# Altium PCB MAGI'sCore-NoButton.PcbDoc (part 1 of 2)
Units mil, origin at the board's own origin, x right, y up, seen from the top; angles counter-clockwise.
Board outline 6000 x 4000 mil, 2 copper layers (Top Layer, Bottom Layer); 22 components, 33 nets, 128 pads, 28 vias.
Unrouted connection lines stored in the file: 1.
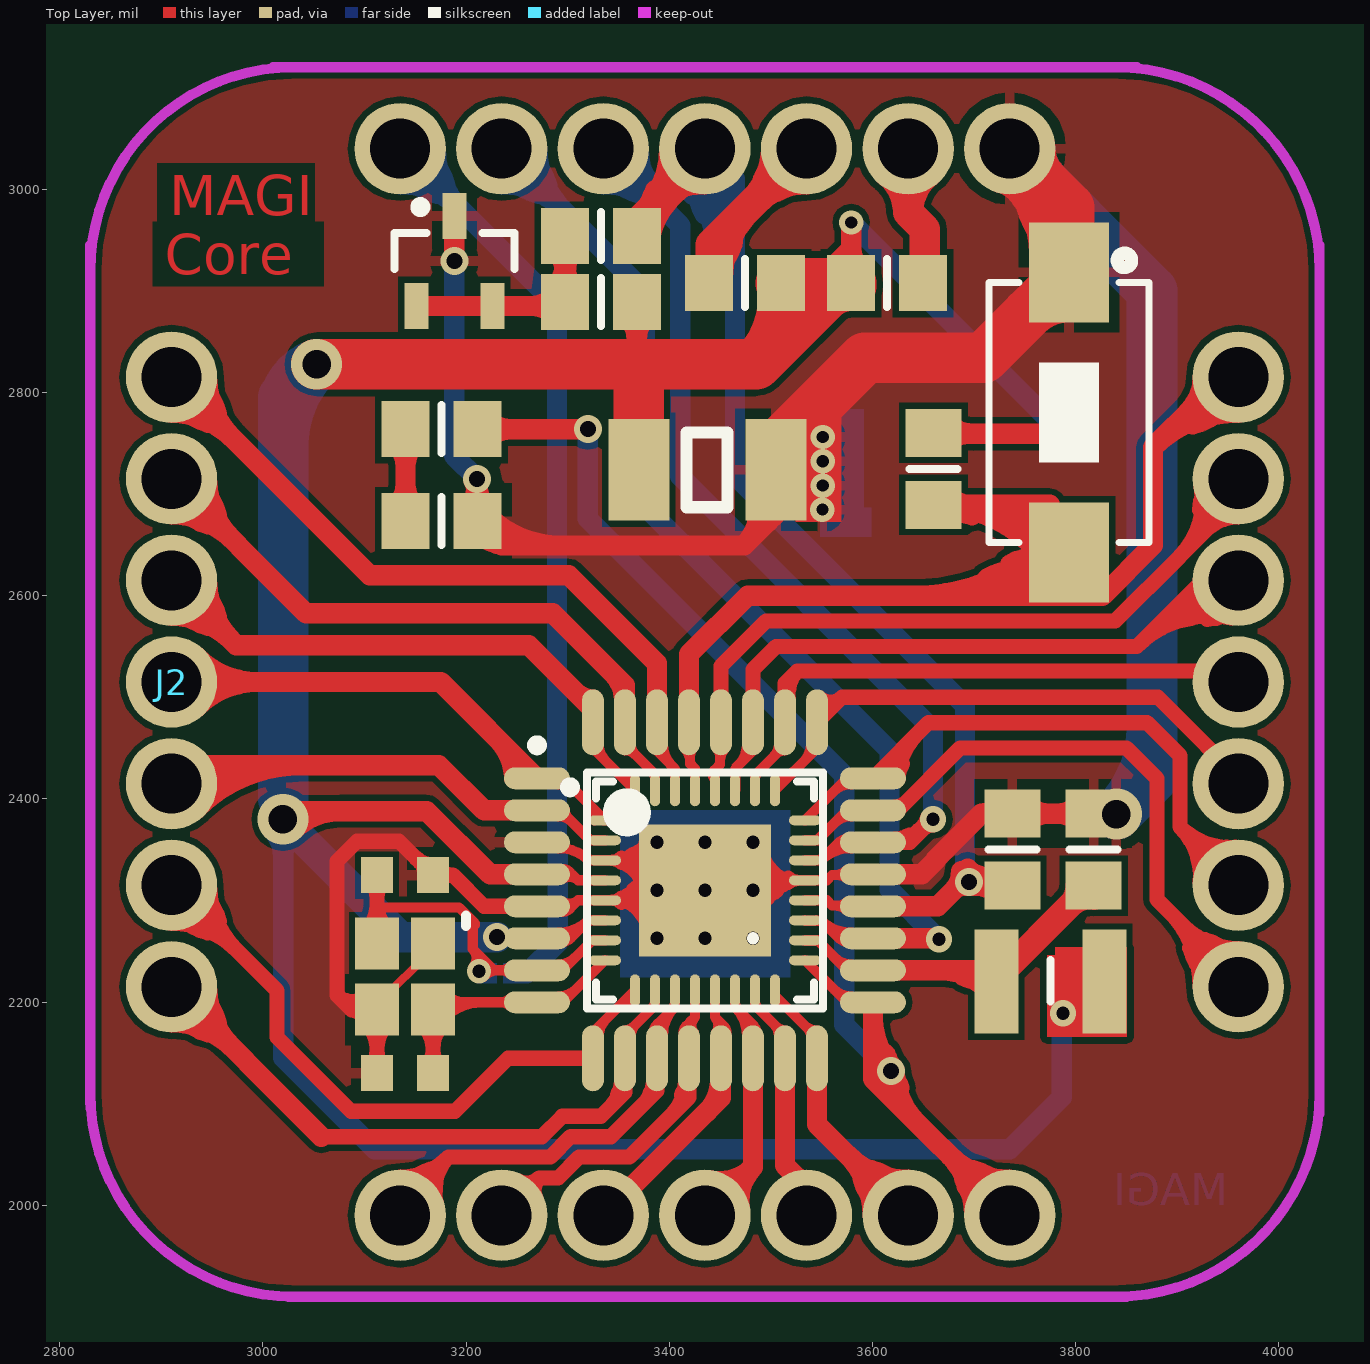
[diagram p0: Top Layer view]
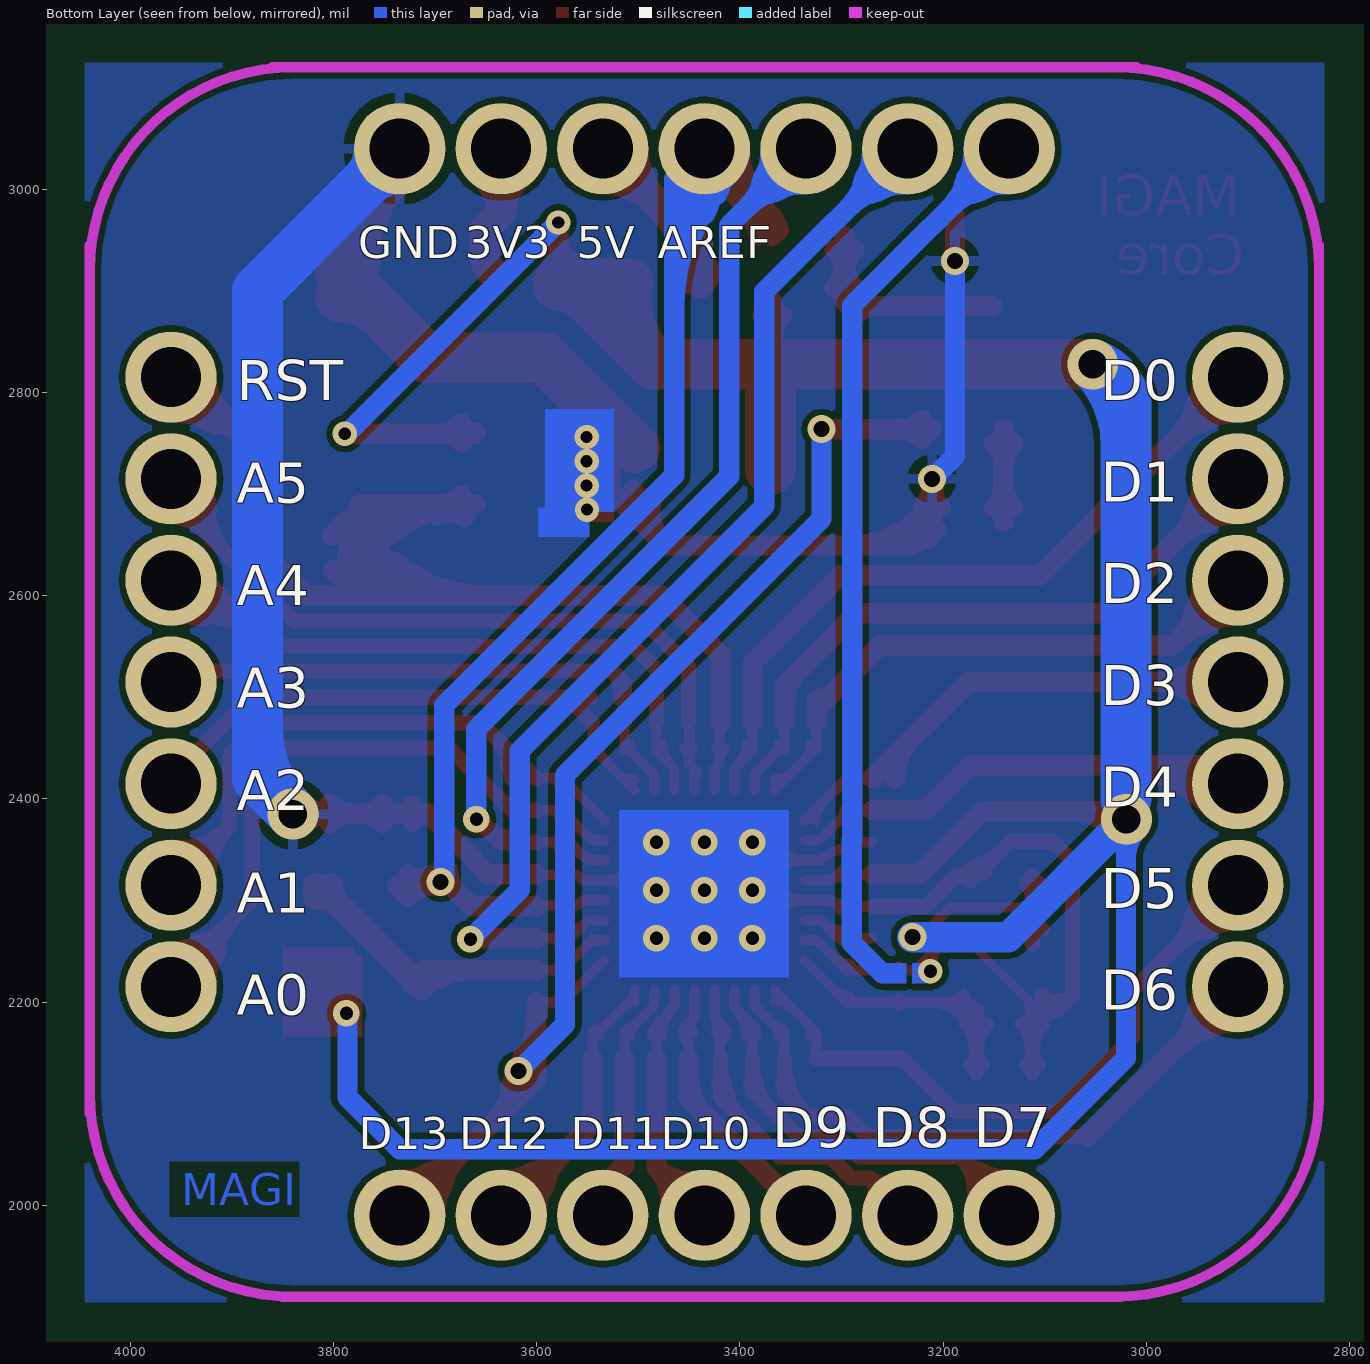
[diagram p1: Bottom Layer view, seen from below]

## Layer stack, top to bottom
Top Solder: solder mask 0.4, Solder Resist, Dk 3.5
Top Layer: signal copper 1.4
Dielectric1: dielectric 12.6, FR-4, Dk 4.8
Bottom Layer: signal copper 1.4
Bottom Solder: solder mask 0.4, Solder Resist, Dk 3.5

## Board outline
1000,1000 7000,1000 7000,5000 1000,5000

## Design rules (kind name [scope] priority, off if disabled: settings)
Clearance [All] p1: gap=6
ComponentClearance [All] p1: gap=0 collisioncheckmode=3 verticalgap=0 showdistances=FALSE
PolygonConnect [All] p1: connectstyle=Relief reliefconductorwidth=10 reliefentries=4 polygonreliefangle="90 Angle" airgapwidth=10
RoutingVias [All] p1: holewidth=28 width=50 viastyle="Through Hole" minholewidth=28 minwidth=50 maxholewidth=28 maxwidth=50
SilkToSilkClearance [All] p1: silktosilkclearance=0
SolderMaskExpansion [All] p1: expansion=4
Width [All] p1: maxlimit=100 minlimit=6 preferedwidth=10
27 further rules are at their usual default settings.

## Components (designator, comment, footprint, x,y, rotation, side; value= is the part's Value field where it differs from the comment)
C1 "CAP_1" 1210 3504.92,2724.02 r180 top
C2 "CAP_1" 6-0805_N 3817.6,2350 r270 top
C3 "CAP_1" 6-0805_N 3737.6,2350 r270 top
C7 "CAP_1" 1608[0603] 3139.76,2129.92 r0 top
C8 "CAP_1" 1608[0603] 3139.76,2324.92 r0 top
Cry1 "SMD-Crystal" 3225 3139.76,2224.92 r270 top
J1 "CON7" CON7 3960,2215 r90 top
J2 "CON7" CON7 2910,2815 r270 top
J3 "CON7" CON7 3735,3040 r180 top
J4 "CON7" CON7 3135,1990 r0 top
L2 "INDUCTOR" 14-1210 3775,2220 r0 top
LED3 "LED_3" 6-0805_N 3175.79,2673.23 r0 top
R1 "RES1_1" 6-0805_N 3332.68,2953.94 r0 top
R1 "RES1_1" 6-0805_N 3332.48,2889.17 r0 top
R2 "000" 6-0805_n 3614.17,2907.48 r180 top
R3 "000" 6-0805_n 3474.41,2907.48 r180 top
R8 "RES1_1" 6-0805_N 3175.79,2763.78 r0 top
R9 "RES1_1" 6-0805_N 3660.04,2724.8 r90 top
RESETButton "" SW 3793.31,2785.43 r180 top
U1 "ATmega8A-AU" 32A_N 3435,2310 r0 top
U2 "ATmega8A-MU" 32M1-A_N 3435,2310 r0 top
U3 "TL431" SOT23_N 3188.39,2929.33 r90 top

## Footprints (in the part's own frame and the unit in brackets; to place one, negate y for a bottom-side part, rotate by r counter-clockwise, add the part's x,y. Pads: shape width x height; smd on the part's side, far side on the other; paste and mask are expansions set on the pad)
6-0805_N [mm] "Chip Resistor, Body 2.0x1.2mm, IPC Medium Density"
  rect 1.2x1.4 smd: 1(-0.9,0) 2(0.9,0)
  silkscreen extent 0,-0.6 0,0.6, body extent -1.07,-0.7 1.07,0.7, height 0.7
6-0805_n [mm] "Chip Resistor, Body 2.0x1.2mm, IPC Medium Density"
  rect 1.2x1.4 smd: 1(-0.9,0) 2(0.9,0)
  silkscreen extent 0,-0.6 0,0.6, body extent -1.07,-0.7 1.07,0.7, height 0.7
14-1210 [mm] "Chip Resistor, Body 3.2x2.5mm, IPC High Density"
  rect 1.1x2.6 smd: 1(-1.35,0) 2(1.35,0)
  silkscreen extent 0,-0.5 0,0.55, body extent -1.68,-1.32 1.68,1.32, height 0.9
32A_N [mm] "32-Pin Thin Quad Flat Pack 0.8 mm Pitch, IPC Medium Density"
  oval 1.65x0.55 smd: 1(-4.2,2.8) 2(-4.2,2) 3(-4.2,1.2) 4(-4.2,0.4) 5(-4.2,-0.4) 6(-4.2,-1.2) 7(-4.2,-2) 8(-4.2,-2.8) 17(4.2,-2.8) 18(4.2,-2) 19(4.2,-1.2) 20(4.2,-0.4) 21(4.2,0.4) 22(4.2,1.2) 23(4.2,2) 24(4.2,2.8)
  oval 0.55x1.65 smd: 9(-2.8,-4.2) 10(-2,-4.2) 11(-1.2,-4.2) 12(-0.4,-4.2) 13(0.4,-4.2) 14(1.2,-4.2) 15(2,-4.2) 16(2.8,-4.2) 25(2.8,4.2) 26(2,4.2) 27(1.2,4.2) 28(0.4,4.2) 29(-0.4,4.2) 30(-1.2,4.2) 31(-2,4.2) 32(-2.8,4.2)
  silkscreen extent -4.32,-2.95 2.95,3.75, body extent -3.5,-3.5 3.5,3.5, height 1.2
32M1-A_N [mm] "QFN, 32-Leads, Body 5x5mm, Pitch 0.5mm, IPC Medium Density"
  oval 0.8x0.25 smd: 1(-2.5,1.75) 2(-2.5,1.25) 3(-2.5,0.75) 4(-2.5,0.25) 5(-2.5,-0.25) 6(-2.5,-0.75) 7(-2.5,-1.25) 8(-2.5,-1.75) 17(2.5,-1.75) 18(2.5,-1.25) 19(2.5,-0.75) 20(2.5,-0.25) 21(2.5,0.25) 22(2.5,0.75) 23(2.5,1.25) 24(2.5,1.75)
  oval 0.25x0.8 smd: 9(-1.75,-2.5) 10(-1.25,-2.5) 11(-0.75,-2.5) 12(-0.25,-2.5) 13(0.25,-2.5) 14(0.75,-2.5) 15(1.25,-2.5) 16(1.75,-2.5) 25(1.75,2.5) 26(1.25,2.5) 27(0.75,2.5) 28(0.25,2.5) 29(-0.25,2.5) 30(-0.75,2.5) 31(-1.25,2.5) 32(-1.75,2.5)
  rect 3.3x3.3 smd: 33(0,0)
  silkscreen extent -3.5,-2.73 2.73,2.73, body extent -2.58,-2.58 2.58,2.58, height 1
1210 [mil]
  rect 60x100 smd: 1(0,0) 2(135,0)
  silkscreen extent 48,-36 88,37
1608[0603] [mm] "Chip Capacitor, Body 1.6x0.8mm, IPC High Density"
  rect 0.8x0.9 smd: 1(-0.7,0) 2(0.7,0)
  body extent -0.87,-0.48 0.87,0.48, height 1.3
3225 [mil] "SMD3225"
  rect 51.18x43.31 smd: 1(-32.5,-27.5) 2(32.5,-27.5) 3(32.5,27.5) 4(-32.5,27.5)
  silkscreen extent -60,60 -50,60
CON7 [mil]
  round 90 hole 59.06: 1(0,0) 2(100,0) 3(200,0) 4(300,0) 5(400,0) 6(500,0) 7(600,0)
SOT23_N [mm] "SOT23, 3-Leads, Body 2.9x1.3mm, Pitch 0.95mm, Lead Span 2.3mm - Reverse Pinning, IPC Medium Density"
  rect 1.15x0.6 smd: 1(1.125,0) 2(-1.125,-0.95) 3(-1.125,0.95)
  silkscreen extent -0.2,-1.5 1.47,1.5, body extent -0.7,-1.5 0.7,1.5, height 1.1
SW [mm]
  rect 2x2.5 smd: 1(0,3.627) 2(0,-3.373)
  silkscreen extent -2,-3.12 2,3.38

## Part data
C1 C2 C3 C7 C8: "Capacitor"
Cry1: library part Crystal
J1 J2 J3 J4: "Connector"
R2 R3: library part RES1
RESETButton: library part CON2, "Connector"
U1: "8-bit AVR Microcontroller, 8KB Flash, 512 Bytes EEPROM, 1KB SRAM, 32-pin TQFP, Industrial Grade (-40癈 to 85癈)"
U2: "8-bit AVR Microcontroller, 8KB Flash, 512 Bytes EEPROM, 1KB SRAM, 33-pin MLF, Industrial Grade (-40癈 to 85癈)"

## Via types
v1: diameter 25.98, hole 12.99, Top Layer to Bottom Layer, tented top, 7 vias
v2: diameter 27.56, hole 15.75, Top Layer to Bottom Layer, 6 vias
v3: diameter 24, hole 12, Top Layer to Bottom Layer, 6 vias
v4: diameter 25.98, hole 12.99, Top Layer to Bottom Layer, 5 vias
v5: diameter 50, hole 28, Top Layer to Bottom Layer, 3 vias
v6: diameter 24, hole 12.99, Top Layer to Bottom Layer, 1 vias

## Nets (pads, with @x,y where several pads share a name; then routed paths per layer and width w, separated by ;. In a path a pad name is that pad's centre, name@x,y a point inside that pad or via, vN(x,y) a via of type N, cw(c..) or ccw(c..) an arc to the next point about the centre after c; other vN are vias at no path point)
3.3V: J3.2 R2.1 | length 377.2
  Top Layer w30: J3.2@3635,3040 3635,2977.2 ; 3635,2977.21 cw(c3685.71,2977.21) 3653.85,3016.66 ccw(c3685.71,2977.21) 3635,2977.21 ; 3635,2977.21 ccw(c3584.29,2977.21) 3616.15,3016.66 cw(c3584.29,2977.21) 3635,2977.21 ; 3635,2977.2 3651.57,2960.63 3651.57,2937.01 ; R2.1@3643.51,2917.51 ccw(c3624.04,2936.99) 3651.57,2936.99 ; R2.1@3643.51,2917.51 ccw(c3624.04,2936.99) 3651.57,2936.99 ; R2.1@3643.51,2917.51 ccw(c3624.04,2936.99) 3651.57,2936.99 ; R2.1@3643.51,2917.51 ccw(c3624.04,2936.99) 3651.57,2936.99
ADC6: J3.6 U1.19 U2.19 | length 1629.6
  Top Layer w10: U2.19@3533.43,2280.47 3533.9,2280 3550,2280 ; U1.19@3600.35,2262.76 3567.24,2262.76 ; 3550,2280 ccw(c3577.6,2307.59) 3578.56,2268.58 cw(c3577.6,2307.59) 3550,2280 ; 3550,2280 3567.24,2262.76 ; 3567.24,2262.76 cw(c3567.24,2254.41) 3573.99,2259.32 ccw(c3567.24,2254.41) 3567.24,2262.76 ; 3567.24,2262.76 ccw(c3567.24,2271.1) 3573.99,2266.19 cw(c3567.24,2271.1) 3567.24,2262.76 ; U2.19@3544.25,2280.55 cw(c3544.25,2268.01) 3553.12,2276.88 ccw(c3544.25,2268.01) U2.19@3544.25,2280.55 ; 3566.49,2263.5 ccw(c3578.39,2275.4) 3578.8,2258.58 cw(c3578.39,2275.4) 3566.49,2263.5
  Top Layer w20: U1.19@3600.35,2262.76 3664.41,2262.76 v4(3665.35,2261.81)
  Bottom Layer w20: J3.6@3230.1,3039 ccw(c3286.07,3050.46) 3271.28,2995.28 ; J3.6@3235,3040 3375.98,2899.02 3375.98,2688.19 3616.73,2447.44 3616.73,2310.43 v4(3665.35,2261.81) ; J3.6@3236,3044.9 cw(c3224.54,2988.93) 3279.72,3003.72 ; 3294.75,2980.25 cw(c3354.5,3040) 3270,3040 ccw(c3354.5,3040) 3294.75,2980.25 ; 3294.75,2980.25 ccw(c3235,2920.5) 3235,3005 cw(c3235,2920.5) 3294.75,2980.25
ADC7: J3.5 U1.22 U2.22 | length 1661.6
  Top Layer w10: U2.22@3533.43,2339.53 3549.53,2339.53 ; U1.22@3600.35,2357.24 3567.24,2357.24 ; 3549.53,2339.53 cw(c3578.23,2310.82) 3578.64,2351.42 ccw(c3578.23,2310.82) 3549.53,2339.53 ; 3549.53,2339.53 3567.24,2357.24 ; 3567.24,2357.24 cw(c3567.24,2348.89) 3573.99,2353.81 ccw(c3567.24,2348.89) 3567.24,2357.24 ; 3567.24,2357.24 ccw(c3567.24,2365.59) 3573.99,2360.67 cw(c3567.24,2365.59) 3567.24,2357.24 ; U2.22@3544.25,2339.45 ccw(c3544.25,2352) 3553.13,2343.12 cw(c3544.25,2352) U2.22@3544.25,2339.45 ; 3566.36,2356.36 cw(c3578.57,2344.15) 3578.74,2361.42 ccw(c3578.57,2344.15) 3566.36,2356.36
  Top Layer w15: U1.22@3600.35,2357.24 3636.77,2357.24 v4(3659.45,2379.92) ; U1.22@3624.89,2355.58 cw(c3641.35,2346.08) 3636.43,2364.43 ; 3647.06,2369.07 cw(c3656.73,2363.49) v4@3658.55,2374.5 ; 3644.15,2368.31 ccw(c3633.42,2386.9) v4@3654.14,2381.34 ; 3644.15,2368.31 ccw(c3633.42,2386.9) v4@3654.14,2381.34 ; 3644.15,2368.31 ccw(c3633.42,2386.9) v4@3654.14,2381.34 ; 3650.07,2370.55 cw(c3659.45,2361.17) 3659.45,2374.43 ccw(c3659.45,2361.17) 3650.07,2370.55 ; 3650.07,2370.55 ccw(c3640.7,2379.92) 3653.96,2379.92 cw(c3640.7,2379.92) 3650.07,2370.55 ; U1.22@3622.01,2360.57 ccw(c3622.01,2404.24) 3652.89,2373.36 cw(c3622.01,2404.24) U1.22@3622.01,2360.57
  Bottom Layer w20: J3.5@3330.1,3039 ccw(c3386.07,3050.46) 3371.28,2995.28 ; J3.5@3335,3040 3410.67,2964.33 3410.67,2717.28 3659.45,2468.5 v4(3659.45,2379.92) ; J3.5@3336,3044.9 cw(c3324.54,2988.93) 3379.72,3003.72 ; 3394.75,2980.25 cw(c3454.5,3040) 3370,3040 ccw(c3454.5,3040) 3394.75,2980.25 ; 3394.75,2980.25 ccw(c3335,2920.5) 3335,3005 cw(c3335,2920.5) 3394.75,2980.25
AREF2V5: R1.1 U3.2 U3.3 | length 389.2
  Top Layer w20: U3.3@3150.98,2885.04 U3.2@3225.79,2885.04 3292.91,2885.04 R1.1@3297.05,2889.17 3297.05,2953.74 R1.1@3297.24,2953.94 ; 3263.69,2885.04 ccw(c3263.69,2918.6) R1.1@3287.42,2894.87 ; 3264.64,2885.04 cw(c3264.64,2852.83) R1.1@3287.42,2875.6 ; R1.1@3287.42,2902.74 ccw(c3264.16,2926) 3297.05,2926 ccw(c3329.93,2926) R1.1@3306.68,2902.74 ; R1.1@3287.61,2940.37 cw(c3264.83,2917.59) 3297.05,2917.59 ; R1.1@3297.05,2916.64 cw(c3330.61,2916.64) R1.1@3306.88,2940.37 ; 3298.81,2923.23 ccw(c3316.57,2918.47) R1.1@3305.36,2903.9
GND: C1.1 C2.1 C3.1 C7.1 C8.2 Cry1.2 Cry1.4 J3.1 LED3.2 RESETButton.2 U1.3 U1.5 U1.21 U2.3 U2.5 U2.21 U2.33 U3.1 | length 10625.6
  Top Layer w8: Cry1.2@3112.26,2192.42 3112.26,2197.39 3167.26,2252.39 Cry1.4@3167.26,2257.42
  Top Layer w10: U1.5@3269.65,2294.25 3304.25,2294.25 ; U1.3@3269.65,2357.24 U1.3@3290,2357.24 ; U1.3@3291.36,2351.42 cw(c3291.77,2310.82) 3320.47,2339.53 U2.3@3336.57,2339.53 3405.47,2339.53 v1(3435,2310) ; U2.3@3347.33,2339.57 cw(c3355.45,2334.88) 3353.03,2343.94 ; 3360.12,2345.23 cw(c3376.79,2324.16) U2.33@3385.24,2349.66 ; 3362.25,2304.19 cw(c3372.12,2287.09) U2.33@3383.25,2303.4 ; U2.33@3372.37,2342.6 ccw(c3360.26,2357.9) U2.33@3379.77,2357.43 ; U2.33@3374.66,2356.73 cw(c3383.77,2345.22) U2.33@3388.39,2359.15 ; U2.33@3375.32,2300.58 ccw(c3370.79,2308.41) U2.33@3379.8,2309.25 ; U2.33@3375.94,2272.2 ccw(c3394.35,2279.16) U2.33@3387.01,2260.89 ; U2.33@3376.07,2301.01 cw(c3382.41,2290.04) U2.33@3385.69,2302.28 ; U2.33@3377.5,2346.66 cw(c3385.36,2336.72) U2.33@3386.83,2349.31 ; U2.33@3392.83,2303.82 cw(c3401.09,2293.76) U2.33@3408.75,2304.3 ; U2.33@3409.5,2304.19 cw(c3419.37,2287.09) U2.33@3430.49,2303.4 ; U2.33@3422.56,2300.58 ccw(c3418.04,2308.41) U2.33@3427.04,2309.25 ; U2.33@3423.32,2301.01 cw(c3429.65,2290.04) U2.33@3432.93,2302.28 ; U2.33@3437.07,2317.72 ccw(c3440.35,2329.96) U2.33@3446.68,2318.99 ; U2.33@3439.51,2316.6 ccw(c3450.63,2332.91) U2.33@3460.5,2315.81 ; U2.33@3442.96,2310.75 cw(c3451.96,2311.59) U2.33@3447.44,2319.42 ; U2.33@3461.27,2315.7 ccw(c3468.93,2326.28) U2.33@3477.21,2316.18 ; U2.33@3483.03,2359.11 cw(c3475.66,2340.81) U2.33@3494.11,2347.78 ; U2.33@3484.35,2317.72 ccw(c3487.63,2329.96) U2.33@3493.97,2318.99 ; U2.33@3486.79,2316.6 ccw(c3497.92,2332.91) 3507.79,2315.81 ; U2.33@3490.24,2310.75 cw(c3499.25,2311.59) U2.33@3494.72,2319.42 ; U1.21@3599.61,2325 3560,2325 3554.84,2319.84 U2.21@3533.43,2319.84 U2.33@3444.84,2319.84 ; 3304.25,2294.25 cw(c3304.25,2305.73) 3295.66,2298.12 ccw(c3304.25,2305.73) 3304.25,2294.25 ; 3304.25,2294.25 ccw(c3304.25,2282.77) 3295.66,2290.39 cw(c3304.25,2282.77) 3304.25,2294.25 ; 3304.25,2294.25 3310.16,2300.16 ; 3310.16,2300.16 cw(c3301.75,2308.57) 3294.73,2298.96 ccw(c3301.75,2308.57) 3310.16,2300.16 ; 3310.16,2300.16 U2.5@3336.57,2300.16 U2.33@3425.16,2300.16 ; U2.5@3336.57,2300.16 cw(c3336.58,2238.42) 3386.51,2274.73 ccw(c3336.58,2238.42) U2.5@3336.57,2300.16 ; U2.5@3336.57,2300.16 ccw(c3336.58,2344.49) 3378.41,2329.83 cw(c3336.58,2344.49) U2.5@3336.57,2300.16 ; U2.3@3336.57,2339.53 ccw(c3336.58,2395.33) 3381.34,2362.02 cw(c3336.58,2395.33) U2.3@3336.57,2339.53 ; U2.3@3336.57,2339.53 cw(c3336.58,2300.62) 3375.31,2304.31 ccw(c3336.58,2300.62) U2.3@3336.57,2339.53 ; 3354.01,2304.79 cw(c3367.8,2288.39) U2.33@3382.33,2304.13 ; 3354.01,2304.79 cw(c3367.8,2288.39) U2.33@3382.33,2304.13 ; 3354.01,2304.79 cw(c3367.8,2288.39) U2.33@3382.33,2304.13 ; 3355.87,2302.66 cw(c3370.23,2272.83) U2.33@3384.35,2302.77 ; 3355.87,2302.66 cw(c3370.23,2272.83) U2.33@3384.35,2302.77 ; 3355.87,2302.66 cw(c3370.23,2272.83) U2.33@3384.35,2302.77 ; 3362.36,2294.5 cw(c3331.81,2257.18) U2.33@3379.8,2261.96 ; 3362.36,2294.5 cw(c3331.81,2257.18) U2.33@3379.8,2261.96 ; 3362.36,2294.5 cw(c3331.81,2257.18) U2.33@3379.8,2261.96 ; 3362.7,2312.09 cw(c3375.56,2296.79) U2.33@3389.12,2311.48 ; 3362.7,2312.09 cw(c3375.56,2296.79) U2.33@3389.12,2311.48 ; 3362.7,2312.09 cw(c3375.56,2296.79) U2.33@3389.12,2311.48 ; 3368.41,2322.83 ccw(c3389.94,2330.86) U2.33@3387.55,2308 ; 3368.41,2322.83 ccw(c3389.94,2330.86) U2.33@3387.55,2308 ; 3368.41,2322.83 ccw(c3389.94,2330.86) U2.33@3387.55,2308 ; 3368.7,2301.72 ccw(c3360.76,2321.58) U2.33@3380.41,2313.15 ; 3368.7,2301.72 ccw(c3360.76,2321.58) U2.33@3380.41,2313.15 ; 3368.7,2301.72 ccw(c3360.76,2321.58) U2.33@3380.41,2313.15 ; 3369.59,2339.11 ccw(c3359.42,2356.74) U2.33@3379.77,2357.1 ; 3369.59,2339.11 ccw(c3359.42,2356.74) U2.33@3379.77,2357.1 ; 3369.59,2339.11 ccw(c3359.42,2356.74) U2.33@3379.77,2357.1 ; U2.33@3371.39,2319.39 cw(c3383.32,2305.2) U2.33@3395.9,2318.82 ; U2.33@3371.39,2319.39 cw(c3383.32,2305.2) U2.33@3395.9,2318.82 ; U2.33@3371.39,2319.39 cw(c3383.32,2305.2) U2.33@3395.9,2318.82 ; U2.33@3371.44,2302.82 cw(c3377.82,2286.84) U2.33@3384.61,2302.65 ; U2.33@3371.44,2302.82 cw(c3377.82,2286.84) U2.33@3384.61,2302.65 ; U2.33@3371.44,2302.82 cw(c3377.82,2286.84) U2.33@3384.61,2302.65 ; U2.33@3374.04,2307.71 ccw(c3388.06,2312.94) U2.33@3386.51,2298.06 ; U2.33@3374.04,2307.71 ccw(c3388.06,2312.94) U2.33@3386.51,2298.06 ; U2.33@3374.04,2307.71 ccw(c3388.06,2312.94) U2.33@3386.51,2298.06 ; U2.33@3374.77,2311.76 cw(c3381.75,2297.27) U2.33@3388.61,2311.82 ; U2.33@3374.77,2311.76 cw(c3381.75,2297.27) U2.33@3388.61,2311.82 ; U2.33@3374.77,2311.76 cw(c3381.75,2297.27) U2.33@3388.61,2311.82 ; U2.33@3376.81,2327.94 ccw(c3391.58,2333.45) U2.33@3389.04,2317.89 ; U2.33@3376.81,2327.94 ccw(c3391.58,2333.45) U2.33@3389.04,2317.89 ; U2.33@3376.81,2327.94 ccw(c3391.58,2333.45) U2.33@3389.04,2317.89 ; U2.33@3379.81,2335.62 cw(c3366.69,2315.72) U2.33@3389.69,2309.47 ; U2.33@3379.81,2335.62 cw(c3366.69,2315.72) U2.33@3389.69,2309.47 ; U2.33@3379.81,2335.62 cw(c3366.69,2315.72) U2.33@3389.69,2309.47 ; U2.33@3381.04,2279.21 cw(c3365.78,2260.56) U2.33@3389.75,2262.96 ; U2.33@3381.04,2279.21 cw(c3365.78,2260.56) U2.33@3389.75,2262.96 ; U2.33@3381.04,2279.21 cw(c3365.78,2260.56) U2.33@3389.75,2262.96 ; U2.33@3386.54,2321.95 cw(c3388.23,2305.38) U2.33@3404.05,2310.57 ; U2.33@3386.54,2321.95 cw(c3388.23,2305.38) U2.33@3404.05,2310.57 ; U2.33@3386.54,2321.95 cw(c3388.23,2305.38) U2.33@3404.05,2310.57 ; U2.33@3387.58,2317.99 ccw(c3387.31,2330.11) U2.33@3397.49,2323.53 ; U2.33@3387.58,2317.99 ccw(c3387.31,2330.11) U2.33@3397.49,2323.53 ; U2.33@3387.58,2317.99 ccw(c3387.31,2330.11) U2.33@3397.49,2323.53 ; U2.33@3391.34,2328.02 cw(c3380.73,2311.91) U2.33@3399.34,2306.85 ; U2.33@3391.34,2328.02 cw(c3380.73,2311.91) U2.33@3399.34,2306.85 ; U2.33@3391.34,2328.02 cw(c3380.73,2311.91) U2.33@3399.34,2306.85 ; U2.33@3395.52,2311.89 cw(c3410.04,2315.42) U2.33@3397.49,2323.53 ; U2.33@3395.52,2311.89 cw(c3410.04,2315.42) U2.33@3397.49,2323.53 ; U2.33@3395.52,2311.89 cw(c3410.04,2315.42) U2.33@3397.49,2323.53 ; U2.33@3421.36,2323.64 cw(c3407.71,2310) 3427.01,2310 ccw(c3407.71,2310) U2.33@3421.36,2323.64 ; U2.33@3421.36,2323.64 ccw(c3435,2337.29) 3435,2317.99 cw(c3435,2337.29) U2.33@3421.36,2323.64 ; U2.33@3425.16,2300.16 cw(c3425.16,2340.3) 3393.97,2315.03 ccw(c3425.16,2340.3) U2.33@3425.16,2300.16 ; U2.33@3425.16,2300.16 cw(c3430.9,2294.41) 3432.97,2302.27 ccw(c3430.9,2294.41) U2.33@3425.16,2300.16 ; U2.33@3425.16,2300.16 ccw(c3419.41,2305.9) 3427.27,2307.97 cw(c3419.41,2305.9) U2.33@3425.16,2300.16 ; U2.33@3425.16,2300.16 v1(3435,2310) ; v1(3435,2310) U2.33@3444.84,2319.84 ; U2.33@3444.84,2319.84 cw(c3444.84,2279.62) 3476.08,2304.96 ccw(c3444.84,2279.62) U2.33@3444.84,2319.84 ; U2.33@3444.84,2319.84 cw(c3439.1,2325.59) 3437.03,2317.73 ccw(c3439.1,2325.59) U2.33@3444.84,2319.84 ; U2.33@3444.84,2319.84 ccw(c3450.59,2314.1) 3442.73,2312.03 cw(c3450.59,2314.1) U2.33@3444.84,2319.84 ; U2.33@3472.5,2296.46 cw(c3482.7,2289.87) U2.33@3482.45,2302.01 ; U2.33@3472.5,2296.46 ccw(c3459.83,2304.65) U2.33@3474.51,2308.15 ; U2.33@3472.5,2296.46 cw(c3482.7,2289.87) U2.33@3482.45,2302.01 ; U2.33@3472.5,2296.46 ccw(c3459.83,2304.65) U2.33@3474.51,2308.15 ; U2.33@3472.5,2296.46 ccw(c3459.83,2304.65) U2.33@3474.51,2308.15 ; U2.33@3472.5,2296.46 cw(c3482.7,2289.87) U2.33@3482.45,2302.01 ; U2.33@3474.15,2301.17 ccw(c3486.69,2314.79) U2.33@3498.59,2300.6 ; U2.33@3474.15,2301.17 ccw(c3486.69,2314.79) U2.33@3498.59,2300.6 ; U2.33@3474.15,2301.17 ccw(c3486.69,2314.79) U2.33@3498.59,2300.6 ; U2.33@3480.29,2357.04 ccw(c3504.35,2359.44) U2.33@3489.03,2340.73 ; U2.33@3480.29,2357.04 ccw(c3504.35,2359.44) U2.33@3489.03,2340.73 ; U2.33@3480.29,2357.04 ccw(c3504.35,2359.44) U2.33@3489.03,2340.73 ; U2.33@3480.92,2308.52 ccw(c3494.47,2323.23) 3507.31,2307.91 ; U2.33@3480.92,2308.52 ccw(c3494.47,2323.23) 3507.31,2307.91 ; U2.33@3480.92,2308.52 ccw(c3494.47,2323.23) 3507.31,2307.91 ; U2.33@3481.43,2308.18 ccw(c3488.26,2322.69) U2.33@3495.21,2308.24 ; U2.33@3481.43,2308.18 ccw(c3488.26,2322.69) U2.33@3495.21,2308.24 ; U2.33@3481.43,2308.18 ccw(c3488.26,2322.69) U2.33@3495.21,2308.24 ; U2.33@3485.44,2317.34 ccw(c3492.19,2333.09) U2.33@3498.55,2317.18 ; U2.33@3485.44,2317.34 ccw(c3492.19,2333.09) U2.33@3498.55,2317.18 ; U2.33@3485.44,2317.34 ccw(c3492.19,2333.09) U2.33@3498.55,2317.18 ; U2.33@3485.69,2317.23 ccw(c3499.79,2347.19) 3514.15,2317.35 ; U2.33@3485.69,2317.23 ccw(c3499.79,2347.19) 3514.15,2317.35 ; U2.33@3485.69,2317.23 ccw(c3499.79,2347.19) 3514.15,2317.35 ; U2.33@3487.7,2315.88 ccw(c3502.24,2331.66) 3516.03,2315.22 ; U2.33@3487.7,2315.88 ccw(c3502.24,2331.66) 3516.03,2315.22 ; U2.33@3487.7,2315.88 ccw(c3502.24,2331.66) 3516.03,2315.22 ; U2.33@3489.63,2306.85 cw(c3509.34,2298.39) 3501.39,2318.31 ; U2.33@3489.63,2306.85 cw(c3509.34,2298.39) 3501.39,2318.31 ; U2.33@3489.63,2306.85 cw(c3509.34,2298.39) 3501.39,2318.31 ; U2.33@3490.24,2358.04 ccw(c3538.32,2362.83) 3507.71,2325.44 ; U2.33@3490.24,2358.04 ccw(c3538.32,2362.83) 3507.71,2325.44 ; U2.33@3490.24,2358.04 ccw(c3538.32,2362.83) 3507.71,2325.44 ; U2.21@3533.43,2319.84 cw(c3533.42,2381.58) 3483.49,2345.27 ccw(c3533.42,2381.58) U2.21@3533.43,2319.84 ; U2.21@3533.43,2319.84 ccw(c3533.42,2275.51) 3491.59,2290.17 cw(c3533.42,2275.51) U2.21@3533.43,2319.84 ; U1.5@3288.84,2290.88 ccw(c3294.77,2299.01) 3301.9,2291.89 cw(c3294.77,2299.01) U1.5@3288.84,2290.88 ; 3316.87,2343.12 ccw(c3325.75,2352) 3325.75,2339.45 cw(c3325.75,2352) 3316.87,2343.12 ; U2.5@3344.7,2300.16 ccw(c3344.7,2353.06) 3382.1,2315.65 cw(c3344.7,2353.06) U2.5@3344.7,2300.16 ; U2.5@3347.33,2300.12 ccw(c3355.45,2304.81) 3353.03,2295.75 cw(c3355.45,2304.81) U2.5@3347.33,2300.12 ; U2.5@3347.33,2300.2 cw(c3355.45,2295.51) 3353.03,2304.56 ccw(c3355.45,2295.51) U2.5@3347.33,2300.2 ; U2.3@3347.33,2339.49 ccw(c3355.45,2344.18) 3353.03,2335.12 cw(c3355.45,2344.18) U2.3@3347.33,2339.49 ; U2.3@3347.58,2339.53 cw(c3347.58,2301.67) 3385.26,2305.26 ccw(c3347.58,2301.67) U2.3@3347.58,2339.53 ; U2.5@3350.68,2300.16 ccw(c3350.68,2339.55) 3387.85,2326.52 cw(c3350.68,2339.55) U2.5@3350.68,2300.16 ; 3356.22,2300.16 cw(c3356.22,2252.7) 3394.6,2280.61 ccw(c3356.22,2252.7) 3356.22,2300.16 ; 3356.48,2339.53 ccw(c3356.48,2380.52) 3389.37,2356.05 cw(c3356.48,2380.52) 3356.48,2339.53 ; 3358.57,2339.53 cw(c3358.57,2302.72) 3395.22,2306.21 ccw(c3358.57,2302.72) 3358.57,2339.53 ; 3361.53,2339.53 ccw(c3361.53,2383.47) 3392.6,2352.4 cw(c3361.53,2383.47) 3361.53,2339.53 ; 3364.78,2300.16 ccw(c3364.78,2334.61) 3397.29,2323.21 cw(c3364.78,2334.61) 3364.78,2300.16 ; 3368.84,2300.16 ccw(c3368.84,2328.91) 3389.18,2308.58 cw(c3368.84,2328.91) 3368.84,2300.16 ; 3369.57,2339.53 cw(c3369.57,2303.76) 3405.17,2307.16 ccw(c3369.57,2303.76) 3369.57,2339.53 ; U2.33@3376.39,2339.53 ccw(c3376.39,2365.7) 3397.39,2350.08 cw(c3376.39,2365.7) U2.33@3376.39,2339.53 ; U2.33@3386.2,2308.74 ccw(c3404.19,2323.31) 3404.19,2300.16 cw(c3404.19,2323.31) U2.33@3386.2,2308.74 ; U2.33@3391.94,2300.16 ccw(c3391.94,2353.06) 3429.35,2315.65 cw(c3391.94,2353.06) U2.33@3391.94,2300.16 ; U2.33@3416.09,2300.16 ccw(c3416.09,2328.91) 3436.42,2308.58 cw(c3416.09,2328.91) U2.33@3416.09,2300.16 ; U2.33@3433.58,2311.42 cw(c3453.91,2291.09) 3453.91,2319.84 ccw(c3453.91,2291.09) U2.33@3433.58,2311.42 ; U2.33@3440.65,2304.35 cw(c3478.06,2266.94) 3478.06,2319.84 ccw(c3478.06,2266.94) U2.33@3440.65,2304.35 ; U2.33@3465.84,2319.84 cw(c3465.84,2296.65) 3483.84,2311.27 ccw(c3465.84,2296.65) U2.33@3465.84,2319.84 ; U2.33@3472.71,2296.79 cw(c3505.22,2285.39) 3505.22,2319.84 ccw(c3505.22,2285.39) U2.33@3472.71,2296.79 ; U2.33@3475.4,2339.39 ccw(c3513.78,2367.3) 3513.78,2319.84 cw(c3513.78,2367.3) U2.33@3475.4,2339.39 ; U2.33@3480.86,2311.42 cw(c3501.2,2291.09) 3501.2,2319.84 ccw(c3501.2,2291.09) U2.33@3480.86,2311.42 ; U2.33@3482.15,2293.48 cw(c3519.32,2280.45) 3519.32,2319.84 ccw(c3519.32,2280.45) U2.33@3482.15,2293.48 ; U2.33@3487.93,2304.35 cw(c3525.34,2266.94) 3525.34,2319.84 ccw(c3525.34,2266.94) U2.33@3487.93,2304.35 ; 3516.97,2315.44 ccw(c3514.55,2324.49) 3522.67,2319.8 cw(c3514.55,2324.49) 3516.97,2315.44 ; 3516.97,2324.25 cw(c3514.55,2315.19) 3522.67,2319.88 ccw(c3514.55,2315.19) 3516.97,2324.25 ; 3562.83,2325 ccw(c3562.83,2341.62) 3574.58,2329.87 cw(c3562.83,2341.62) 3562.83,2325 ; 3566.44,2325 cw(c3566.44,2313.49) 3574.58,2321.63 ccw(c3566.44,2313.49) 3566.44,2325
  Top Layer w15: C7.1@3112.2,2129.92 3112.2,2192.36 Cry1.2@3112.26,2192.42 3087.11,2192.42 ; U1.5@3269.65,2294.25 3217.56,2294.25 3186.89,2324.92 ; 3072.84,2206.69 ccw(c3087.71,2221.57) 3102.39,2206.5 cw(c3087.71,2221.57) 3072.84,2206.69 ; 3072.83,2206.69 3072.83,2338.58 3092.52,2358.27 3133.98,2358.27 C8.2@3167.32,2324.92 3186.89,2324.92 ; 3072.83,2206.69 3087.11,2192.42 ; 3087.11,2192.42 cw(c3087.11,2177.14) 3100.17,2185.07 ccw(c3087.11,2177.14) 3087.11,2192.42 ; 3087.11,2192.42 ccw(c3087.11,2207.7) 3100.17,2199.77 cw(c3087.11,2207.7) 3087.11,2192.42 ; 3112.2,2151.8 cw(c3092.29,2151.8) 3106.37,2137.72 ccw(c3092.29,2151.8) 3112.2,2151.8 ; 3112.2,2151.8 ccw(c3132.12,2151.8) 3118.04,2137.72 cw(c3132.12,2151.8) 3112.2,2151.8 ; 3186.89,2324.92 cw(c3186.89,2344) 3173.23,2330.68 ccw(c3186.89,2344) 3186.89,2324.92 ; 3186.89,2324.92 ccw(c3186.89,2305.84) 3173.23,2319.16 cw(c3186.89,2305.84) 3186.89,2324.92 ; 3083.58,2195.94 ccw(c3098.32,2210.68) 3112.85,2195.75 cw(c3098.32,2210.68) 3083.58,2195.94 ; Cry1.2@3102.26,2178.48 cw(c3078.24,2154.46) 3112.2,2154.46 ccw(c3078.24,2154.46) Cry1.2@3102.26,2178.48 ; 3112.2,2154.17 cw(c3146.58,2154.17) 3122.27,2178.48 ccw(c3146.58,2154.17) 3112.2,2154.17 ; 3149.88,2342.36 ccw(c3167.32,2359.8) 3167.32,2335.14 cw(c3167.32,2359.8) 3149.88,2342.36 ; C8.2@3154.63,2337.61 cw(c3143.91,2326.89) 3159.07,2326.89 ccw(c3143.91,2326.89) C8.2@3154.63,2337.61
  Top Layer w20: v2(3188.39,2929.33) U3.1@3188.39,2973.62 ; LED3.2@3202.08,2687.26 ccw(c3183.42,2707.87) v2@3211.22,2707.87 ; LED3.2@3206.71,2664.78 ccw(c3243.82,2701.89) 3243.82,2649.41 ; v2@3207.55,2713.07 cw(c3193.1,2704.73) LED3.2@3209.22,2700.41 ; LED3.2@3220.36,2687.26 cw(c3239.02,2707.87) v2@3211.22,2707.87 ; LED3.2@3220.85,2678.92 ccw(c3292.11,2750.18) 3292.11,2649.41 ; C1.1@3527.36,2722.24 3527.36,2702.95 3473.82,2649.41 ; U1.21@3600.35,2325.75 3648.58,2325.75 3662.17,2339.33 3662.17,2340.66 3706.94,2385.43 ; C2.1@3817.6,2385.43 C3.1@3737.6,2385.43 3706.94,2385.43 ; v2@3211.22,2707.87 LED3.2@3211.22,2673.23 3235.04,2649.41 ; LED3.2@3213.8,2655.92 cw(c3218.29,2632.67) 3235.04,2649.41 ; LED3.2@3213.8,2655.92 cw(c3218.29,2632.67) 3235.04,2649.41 ; LED3.2@3213.8,2655.92 cw(c3218.29,2632.67) 3235.04,2649.41 ; LED3.2@3224.84,2669.29 ccw(c3248.22,2669.29) LED3.2@3231.69,2652.76 ; LED3.2@3224.84,2669.29 ccw(c3248.22,2669.29) LED3.2@3231.69,2652.76 ; LED3.2@3224.84,2669.29 ccw(c3248.22,2669.29) LED3.2@3231.69,2652.76 ; 3235.04,2649.41 3473.82,2649.41 ; 3473.82,2649.41 ccw(c3439.56,2683.67) 3485.82,2698.07 cw(c3439.56,2683.67) 3473.82,2649.41 ; 3706.94,2385.43 cw(c3706.94,2366.03) 3722.64,2377.43 ccw(c3706.94,2366.03) 3706.94,2385.43 ; 3706.94,2385.43 ccw(c3706.94,2404.83) 3722.64,2393.44 cw(c3706.94,2404.83) 3706.94,2385.43 ; 3774.42,2385.43 cw(c3774.42,2418.32) 3751.17,2395.07 ccw(c3774.42,2418.32) 3774.42,2385.43 ; 3774.42,2385.43 ccw(c3774.42,2352.55) 3751.17,2375.8 cw(c3774.42,2352.55) 3774.42,2385.43 ; 3780.78,2385.43 cw(c3780.78,2352.55) 3804.03,2375.8 ccw(c3780.78,2352.55) 3780.78,2385.43 ; 3780.78,2385.43 ccw(c3780.78,2418.32) 3804.03,2395.07 cw(c3780.78,2418.32) 3780.78,2385.43 ; 3497.22,2672.82 ccw(c3475.26,2694.78) 3504.92,2704.02 cw(c3475.26,2694.78) 3497.22,2672.82 ; C2.1@3802.74,2385.43 cw(c3802.74,2347.74) 3829.39,2374.39 ccw(c3802.74,2347.74) C2.1@3802.74,2385.43 ; C2.1@3804.83,2385.43 ccw(c3804.83,2420.17) 3829.39,2395.61 cw(c3804.83,2420.17) C2.1@3804.83,2385.43
  Top Layer w50: C1.1@3503.94,2745.67 3592.32,2834.06 3709.13,2834.06 RESETButton.2@3793.31,2918.23 3793.31,2981.69 J3.1@3735,3040 ; J3.1@3729.82,3020.68 cw(c3717.32,2974.04) 3759.15,2998.18 cw(c3800.95,3022.33) J3.1@3754.32,3034.82 ; 3764.39,2991.38 ccw(c3844.36,3009.9) RESETButton.2@3800.91,2940.26 ; J3.1@3735,3040 cw(c3628.71,2933.7) 3778.95,2928.56 ccw(c3628.71,2933.7) J3.1@3735,3040 ; 3769.14,3005.86 cw(c3803.28,3040) 3755,3040 ccw(c3803.28,3040) 3769.14,3005.86 ; 3769.14,3005.86 ccw(c3735,2971.72) 3735,3020 cw(c3735,2971.72) 3769.14,3005.86 ; 3751.97,2876.9 cw(c3793.31,2835.56) 3793.31,2894.02 ccw(c3793.31,2835.56) 3751.97,2876.9
  Bottom Layer w20: v2(3188.39,2929.33) 3188.39,2737.4 v2(3210.83,2714.96)
  Bottom Layer w50: J3.1@3735,3040 3875,2900 3875,2420 v5(3840,2385) ; 3769.14,3005.86 cw(c3803.28,3040) 3755,3040 ccw(c3803.28,3040) 3769.14,3005.86 ; 3769.14,3005.86 ccw(c3735,2971.72) 3735,3020 cw(c3735,2971.72) 3769.14,3005.86 ; v5(3840,2385) ccw(c3755.5,2469.5) 3875,2469.5 cw(c3755.5,2469.5) v5(3840,2385)
  other v1: 3387.76,2262.76 3435,2262.76 3482.24,2262.76 3387.76,2310 3387.76,2357.24 3435,2357.24
  other v3: 3550.59,2684.65 3550.98,2708.27 3550.98,2732.28 3550.98,2756.1
  other v4: 3482.28,2310 3482.28,2357.24
LED: J4.7 R8.2 U1.17 U2.17 | length 1998.4
  Top Layer w10: U2.17@3533.43,2241.1 3574.76,2199.76 U1.17@3600.35,2199.76 ; 3562.03,2212.49 ccw(c3578.7,2229.16) 3578.7,2205.59 cw(c3578.7,2229.16) 3562.03,2212.49
  Top Layer w20: R8.2@3211.22,2763.78 v2(3319.68,2763.78) ; U1.17@3600.35,2199.76 3600.35,2124.65 J4.7@3735,1990 ; 3612.3,2149.25 cw(c3593.61,2138.46) v2@3614.46,2132.87 ; v2@3616.22,2128.62 cw(c3605.43,2109.92) 3626.28,2115.51 ; 3690.28,2026.28 ccw(c3745.46,2041.07) J4.7@3734,1985.1 ; 3698.72,2034.72 cw(c3683.93,1979.54) J4.7@3739.9,1991 ; 3244.11,2763.78 cw(c3244.11,2796.67) 3220.85,2773.41 ccw(c3244.11,2796.67) 3244.11,2763.78 ; 3244.11,2763.78 ccw(c3244.11,2730.89) 3220.85,2754.15 cw(c3244.11,2730.89) 3244.11,2763.78 ; 3675.25,2049.75 cw(c3615.5,1990) 3700,1990 ccw(c3615.5,1990) 3675.25,2049.75 ; 3675.25,2049.75 ccw(c3735,2109.5) 3735,2025 cw(c3735,2109.5) 3675.25,2049.75 ; 3600.35,2183.88 ccw(c3670.1,2183.88) 3620.78,2134.56 cw(c3670.1,2183.88) 3600.35,2183.88 ; v2@3621.89,2131.89 ccw(c3691.37,2131.89) 3642.24,2082.76 cw(c3691.37,2131.89) v2@3621.89,2131.89
  Bottom Layer w20: v2(3319.68,2763.78) 3319.68,2675.79 3572.24,2423.23 3572.24,2177.76 v2(3618.11,2131.89)
MISO: J4.6 U1.16 U2.16 | length 732
  Top Layer w10: U2.16@3503.9,2211.57 3503.9,2206.1 3545.24,2164.76 U1.16@3545.24,2144.64 ; U2.16@3503.9,2200.83 cw(c3503.9,2188.09) 3512.9,2197.1 ccw(c3503.9,2188.09) U2.16@3503.9,2200.83 ; 3532.67,2177.33 ccw(c3545.24,2189.9) 3545.24,2172.13 cw(c3545.24,2189.9) 3532.67,2177.33 ; 3536.38,2173.62 cw(c3529.05,2166.3) 3539.41,2166.3 ccw(c3529.05,2166.3) 3536.38,2173.62
  Top Layer w20: U1.16@3545.24,2144.64 3545.24,2079.76 J4.6@3635,1990 ; 3590.28,2026.28 ccw(c3645.46,2041.07) J4.6@3634,1985.1 ; 3598.72,2034.72 cw(c3583.93,1979.54) J4.6@3639.9,1991 ; 3575.25,2049.75 cw(c3515.5,1990) 3600,1990 ccw(c3515.5,1990) 3575.25,2049.75 ; 3575.25,2049.75 ccw(c3635,2109.5) 3635,2025 cw(c3635,2109.5) 3575.25,2049.75
MOSI: J4.5 U1.15 U2.15 | length 293.8
  Top Layer w10: U2.15@3484.13,2200.75 ccw(c3492.99,2200.75) 3486.73,2194.48 ; U2.15@3484.21,2211.57 3484.21,2197 3513.74,2167.47 U1.15@3513.74,2144.64 ; 3502.96,2178.25 cw(c3491.01,2166.3) 3507.91,2166.3 ccw(c3491.01,2166.3) 3502.96,2178.25 ; 3505.8,2175.42 ccw(c3513.74,2183.36) 3513.74,2172.13 cw(c3513.74,2183.36) 3505.8,2175.42
  Top Layer w20: U1.15@3513.74,2144.64 3513.74,2039.41 3535,2018.15 J4.5@3535,1990
NetC2_2: C2.2 L2.1 U1.18 U2.18 | length 599.7
  Top Layer w10: U2.18@3533.43,2260 U2.18@3546.46,2260 ; U2.18@3533.43,2260.79 3545.67,2260.79 U2.18@3546.46,2260 ; U1.18@3600.35,2231.26 3575.2,2231.26 U2.18@3546.46,2260 ; 3562.77,2243.68 ccw(c3578.7,2259.61) 3578.7,2237.09 cw(c3578.7,2259.61) 3562.77,2243.68
  Top Layer w20: U1.18@3600.35,2231.26 3710.59,2231.26 L2.1@3721.85,2220 ; 3689.39,2225.74 ccw(c3699.77,2243.71) L2.1@3713.91,2228.53 ; 3666.53,2231.26 cw(c3666.53,2164.68) 3713.61,2211.76 ccw(c3666.53,2164.68) 3666.53,2231.26
  Top Layer w25: L2.1@3721.85,2220 3721.85,2222.78 3802.22,2303.15 C2.2@3805,2303.15 ; C2.2@3817.6,2303.15 C2.2@3817.6,2314.57 ; C2.2@3794.63,2295.56 cw(c3813.66,2276.54) 3813.66,2303.44 ccw(c3813.66,2276.54) C2.2@3794.63,2295.56 ; C2.2@3794.69,2295.62 ccw(c3775.74,2314.57) 3802.54,2314.57 cw(c3775.74,2314.57) C2.2@3794.69,2295.62